# Altium PCB PCB1.PcbDoc
Units mil, origin at the board's own origin, x right, y up, seen from the top; angles counter-clockwise.
Board outline 6000 x 4000 mil, 2 copper layers (Top Layer, Bottom Layer); 2 components, 0 nets, 60 pads, 16 vias.
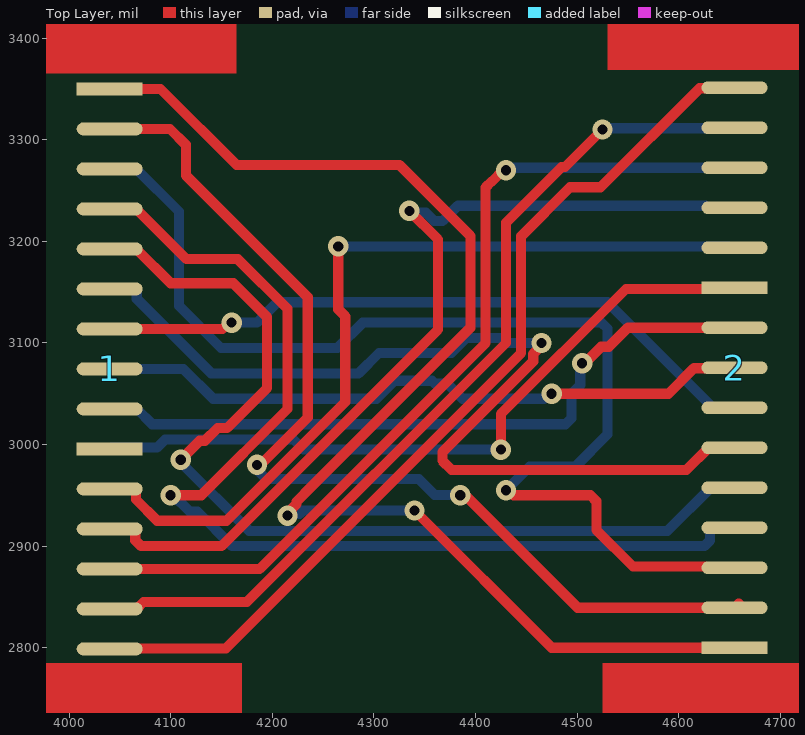
[diagram p0: Top Layer view]
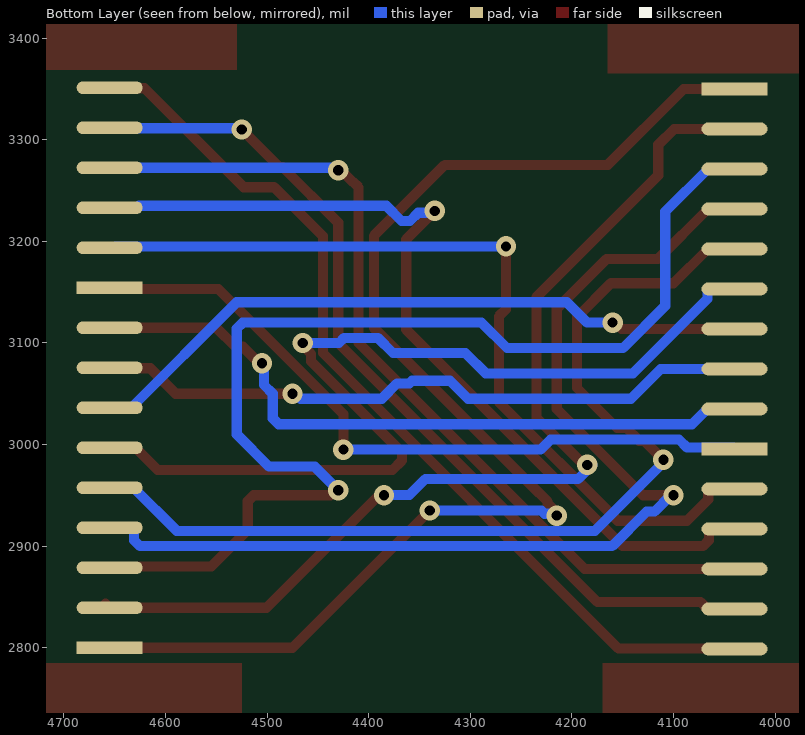
[diagram p1: Bottom Layer view, seen from below]

## Layer stack, top to bottom
Top Solder: solder mask 0.4, Solder Resist, Dk 3.5
Top Layer: signal copper 1.4
Dielectric 1: dielectric 12.6, FR-4, Dk 4.8
Bottom Layer: signal copper 1.4
Bottom Solder: solder mask 0.4, Solder Resist, Dk 3.5

## Board outline
1000,1000 7000,1000 7000,5000 1000,5000

## Design rules (kind name [scope] priority, off if disabled: settings)
Clearance [All] p1: gap=10 ignorepadtopadclearanceinfootprint=FALSE except(0: Arc-Hole Track-Hole SMDPad-Hole THPad-Hole Via-Hole Fill-Hole Poly-Hole Region-Hole Text-Hole)
PolygonConnect [All] p1: connectstyle=Relief reliefconductorwidth=10 reliefentries=4 polygonreliefangle="90 Angle" airgapwidth=10
RoutingVias [All] p1: holewidth=28 width=50 viastyle="Through Hole" minholewidth=28 minwidth=50 maxholewidth=28 maxwidth=50
SolderMaskExpansion [All] p1: expansion=4 istentingtop=FALSE
Width [All] p1: maxlimit=10 minlimit=10 preferedwidth=10
30 further rules are at their usual default settings.

## Components (designator, comment, footprint, x,y, rotation, side; value= is the part's Value field where it differs from the comment)
1 "Component_1" 15pin_1mm_FPC 4165,3350 r270 top
2 "Component_2" 15pin_1mm_FPC 4530,2800.04 r90 top

## Footprints (in the part's own frame and the unit in brackets; to place one, negate y for a bottom-side part, rotate by r counter-clockwise, add the part's x,y. Pads: shape width x height; smd on the part's side, far side on the other; paste and mask are expansions set on the pad)
15pin_1mm_FPC [mm]
  rect 0.32x1.65 smd: 1(0,-3.175) 10(9,-3.175)
  oval 0.32x1.65 smd: 2(1,-3.175) 3(2,-3.175) 4(3,-3.175) 5(4,-3.175) 6(5,-3.175) 7(6,-3.175) 8(7,-3.175) 9(8,-3.175) 11(10,-3.175) 12(11,-3.175) 13(12,-3.175) 14(13,-3.175) 15(14,-3.175)
  rect 0.32x1.65 smd far side: B1(0,-3.175) B10(9,-3.175)
  oval 0.32x1.65 smd far side: B2(1,-3.175) B3(2,-3.175) B4(3,-3.175) B5(4,-3.175) B6(5,-3.175) B7(6,-3.175) B8(7,-3.175) B9(8,-3.175) B11(10,-3.175) B12(11,-3.175) B13(12,-3.175) B14(13,-3.175) B15(14,-3.175)

## Part data
2: library part Component_1

## Via types
v1: diameter 20, hole 10, Top Layer to Bottom Layer, 16 vias

## Nets (pads, with @x,y where several pads share a name; then routed paths per layer and width w, separated by ;. In a path a pad name is that pad's centre, name@x,y a point inside that pad or via, vN(x,y) a via of type N, cw(c..) or ccw(c..) an arc to the next point about the centre after c; other vN are vias at no path point)
pads on no net: 1.1 1.2 1.3 1.4 1.5 1.6 1.7 1.8 1.9 1.10 1.11 1.12 1.13 1.14 1.15 1.B1 1.B2 1.B3 1.B4 1.B5 1.B6 1.B7 1.B8 1.B9 1.B10 1.B11 1.B12 1.B13 1.B14 1.B15 2.1 2.2 2.3 2.4 2.5 2.6 2.7 2.8 2.9 2.10 2.11 2.12 2.13 2.14 2.15 2.B1 2.B2 2.B3 2.B4 2.B5 2.B6 2.B7 2.B8 2.B9 2.B10 2.B11 2.B12 2.B13 2.B14 2.B15
copper on no net: | length 13446.8
  Top Layer w10: 4040,2798.82 4040.5,2799.32 4154.32,2799.32 4445,3090 4445,3205 4493.15,3253.15 4523.15,3253.15 4620.72,3350.72 4654.5,3350.72 4655,3351.22 ; 4040,2838.19 4040.68,2838.86 4067.2,2838.86 4073.34,2845 4175,2845 4430,3100 4430,3218.28 4484.87,3273.15 4488.15,3273.15 v1(4525,3310) ; 4040,2877.56 4187.56,2877.56 4410,3100 4410,3253.09 4415.86,3258.94 4416.24,3258.94 4427.29,3270 v1(4430,3270) ; 4040,2916.93 4064.03,2916.93 4065.23,2915.73 4065.23,2905.86 4071.09,2900 4150,2900 4363.09,3113.09 4363.09,3201.91 v1(4335,3230) ; 4040,2956.3 4064.66,2956.3 4065.86,2955.1 4065.86,2945.86 4086.72,2925 4155,2925 4271.91,3041.91 4271.91,3126.15 4265,3133.06 v1(4265,3195) ; 4040,3074.41 4040.3,3074.7 ; 4040,3113.78 4151.07,3113.78 4157.29,3120 v1(4160,3120) ; 4040,3192.52 4066.18,3192.52 4100.01,3158.69 4161.67,3158.69 4195,3125.36 4195,3055.67 4155.62,3016.29 4146.29,3016.29 4133.71,3003.71 4128.71,3003.71 v1(4110,2985) ; 4040,3231.89 4066.18,3231.89 4115.55,3182.52 4166.12,3182.52 4215,3133.64 4215,3047.38 4215,3034.92 4130.08,2950 v1(4100,2950) ; 4040,3310.63 4099.37,3310.63 4115,3295 4115,3286.89 4115,3265 4235,3145 4235,3026.64 4188.36,2980 v1(4185,2980) ; 4040,3350 4090,3350 4092.48,3347.52 4164.76,3275.24 4325.11,3275.24 4395,3205.36 4395,3115 4238.96,2958.96 4223.96,2943.96 4223.96,2941.67 4215,2932.71 v1(4215,2930) ; v1(4340,2935) 4475,2800 4655.14,2800 ; v1@4390,2950 4500.59,2839.41 4659.14,2839.41 4659.14,2843.55 ; v1(4425,2995) 4425,3030 4548.15,3153.15 4655,3153.15 ; v1(4430,2955) 4432.71,2955 4437.71,2950 4513.21,2950 4519.07,2944.14 4519.07,2915.93 4555,2880 4625.76,2880 4626.48,2879.28 4654.5,2879.28 4655,2878.78 ; v1(4465,3100) 4465,3097.29 4456.89,3089.19 4456.89,3081.89 4429.82,3054.82 4367.43,2992.43 4367.43,2984.15 4376.58,2975 4607.63,2975 4629.52,2996.89 4655,2996.89 ; v1(4475,3050) 4590,3050 4615,3075 4625,3075 4625.13,3075.13 4654.5,3075.13 4655,3075.63 ; v1(4505,3080) 4507.71,3080 4523.9,3096.19 4531.23,3096.19 4550.04,3115 4658.58,3115
  Bottom Layer w10: 4040,2995.67 4041.3,2996.97 4086.61,2996.97 4094.64,3005 4220.97,3005 4230.97,2995 v1(4425,2995) ; 4040,3035.04 4066.88,3035.04 4081.92,3020 4488.69,3020 4494.55,3025.86 4494.55,3050 4503.09,3058.54 4503.09,3078.09 v1(4505,3080) ; 4040,3074.41 4112.53,3074.41 4141.94,3045 4302.29,3045 4320,3062.71 4357.29,3062.71 4360,3060 4365,3060 4372.29,3060 4387.29,3045 4467.29,3045 4472.29,3050 v1(4475,3050) ; 4040,3153.15 4065.38,3153.15 4066.58,3151.95 4066.58,3143.42 4140,3070 4195.97,3070 4285,3070 4305,3090 4376.15,3090 4391.15,3105 4424.22,3105 4429.22,3100 v1(4465,3100) ; 4040,3271.26 4066.18,3271.26 4108.16,3229.28 4108.16,3136.48 4149.64,3095 4263.96,3095 4288.96,3120 4524.14,3120 4530,3114.14 4530,3010 4498.23,2978.23 4453.23,2978.23 v1(4430,2955) ; v1(4100,2950) 4102.71,2950 4118.68,2934.03 4126.46,2934.03 4160.49,2900 4625.13,2900 4630.99,2905.86 4630.99,2916.95 4632.19,2918.15 4655,2918.15 ; v1(4110,2985) 4110,2982.29 4177.29,2915 4589.04,2915 4631.56,2957.52 4655,2957.52 ; v1(4160,3120) 4185,3120 4205,3140 4530,3140 4635,3035 4647.7,3035 ; v1@4180,2980 4193.94,2966.06 4344.3,2966.06 4360,2950.36 4384.64,2950.36 v1(4385,2950) ; v1(4215,2930) 4216.91,2931.91 4226.91,2931.91 4230,2935 v1(4340,2935) ; v1(4265,3195) 4300,3195 4546.66,3195 4649.21,3195 ; v1(4335,3230) 4336.91,3228.09 4351.34,3228.09 4359.42,3220 4367.71,3220 4382.71,3235 4626.23,3235 4627.62,3233.61 4653.16,3233.61 ; v1(4430,3270) 4432.71,3270 4435.19,3272.48 4655,3272.48 ; v1(4525,3310) 4526.35,3311.35 4654.5,3311.35 4655,3311.85

## Other copper
Top Layer:
  rectangle: 4524.84,2633.43 4765,2785
  rectangle: 3929.84,2633.43 4170,2785
  rectangle: 4529.84,3368.43 4770,3520
  rectangle: 3924.84,3365 4165,3516.57